# Altium PCB PCB1.PcbDoc
Units mm, origin at the board's own origin, x right, y up, seen from the top; angles counter-clockwise.
Board outline 90.04 x 75.06 mm, 2 copper layers (Top Layer, Bottom Layer); 75 components, 54 nets, 231 pads, 8 vias.
Unrouted connection lines stored in the file: 11.
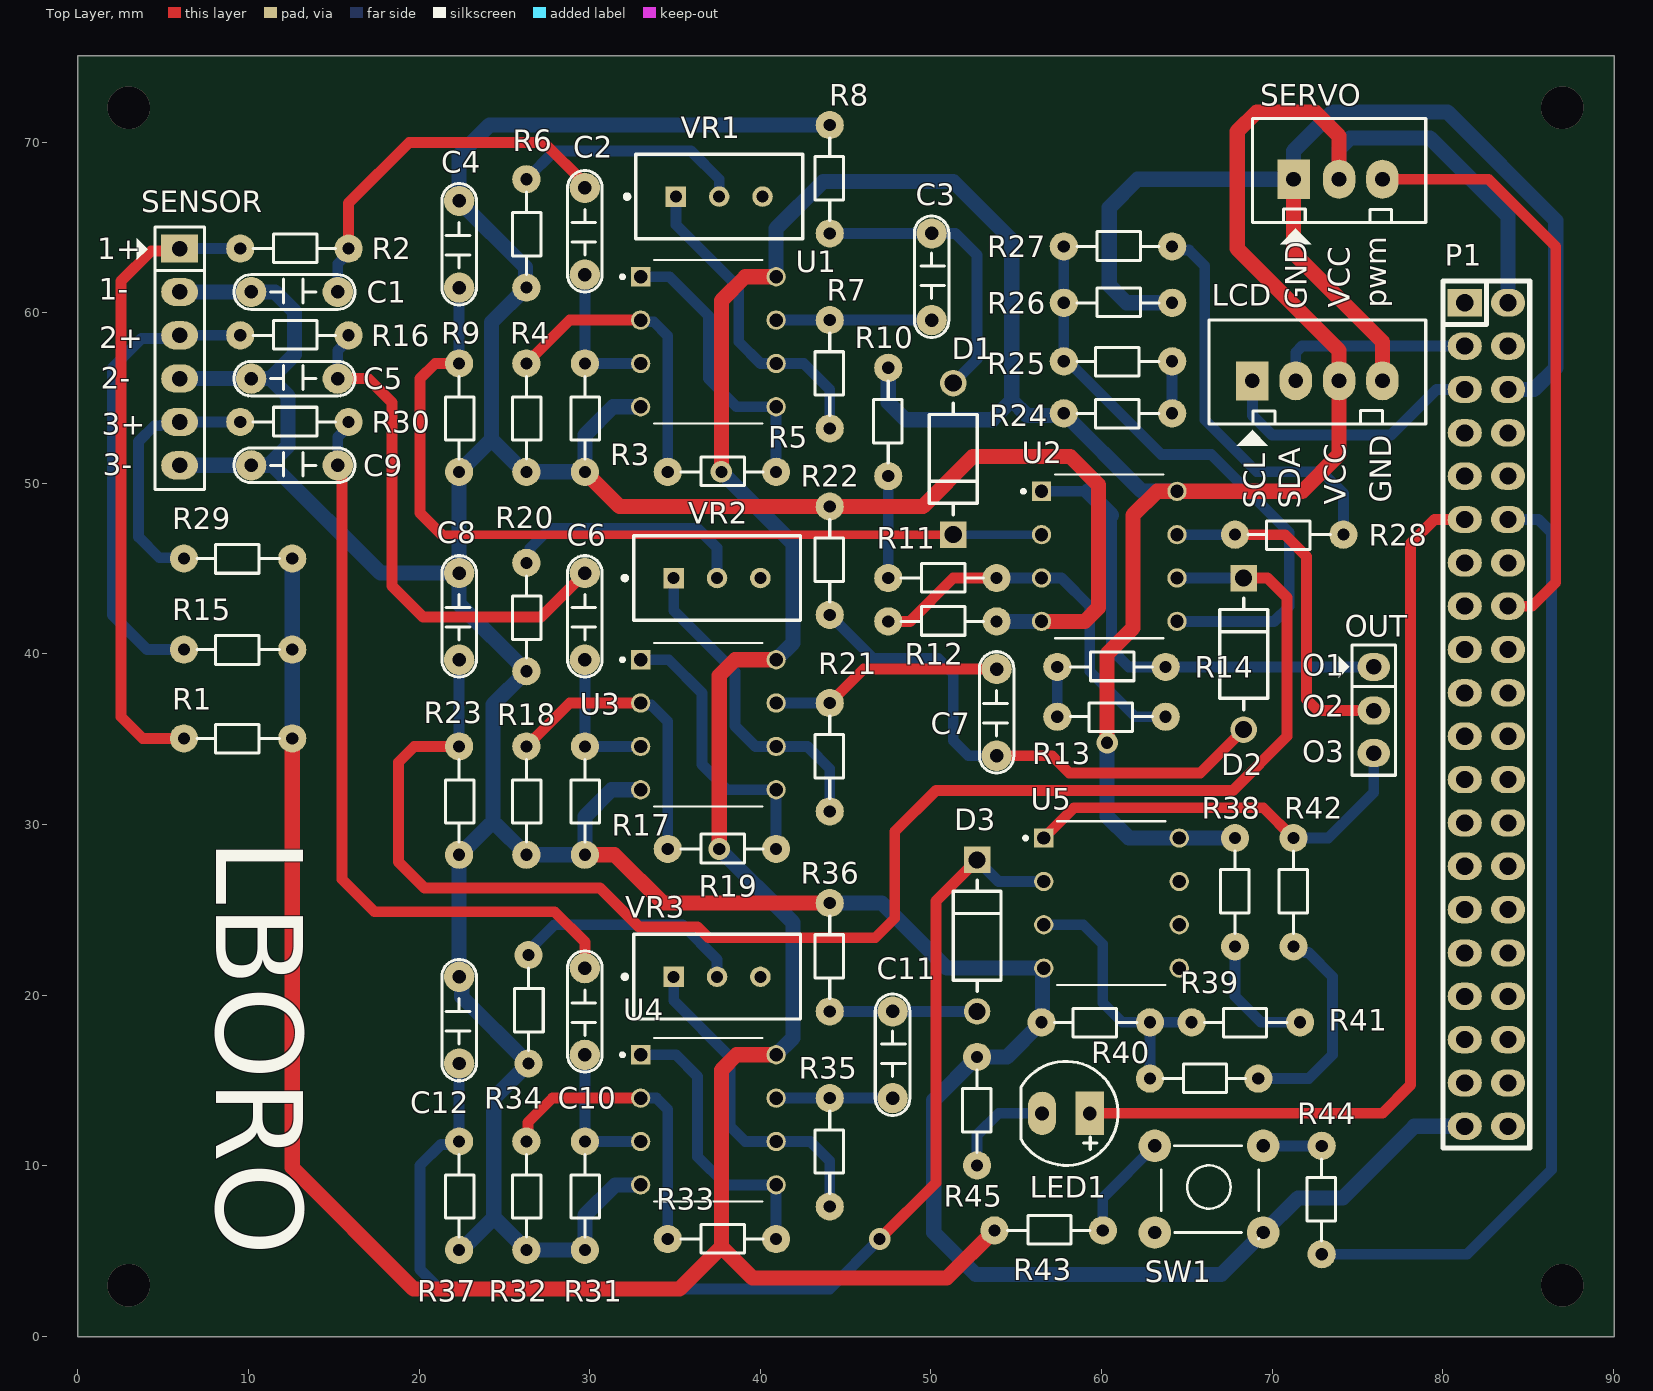
[diagram p0: Top Layer view]
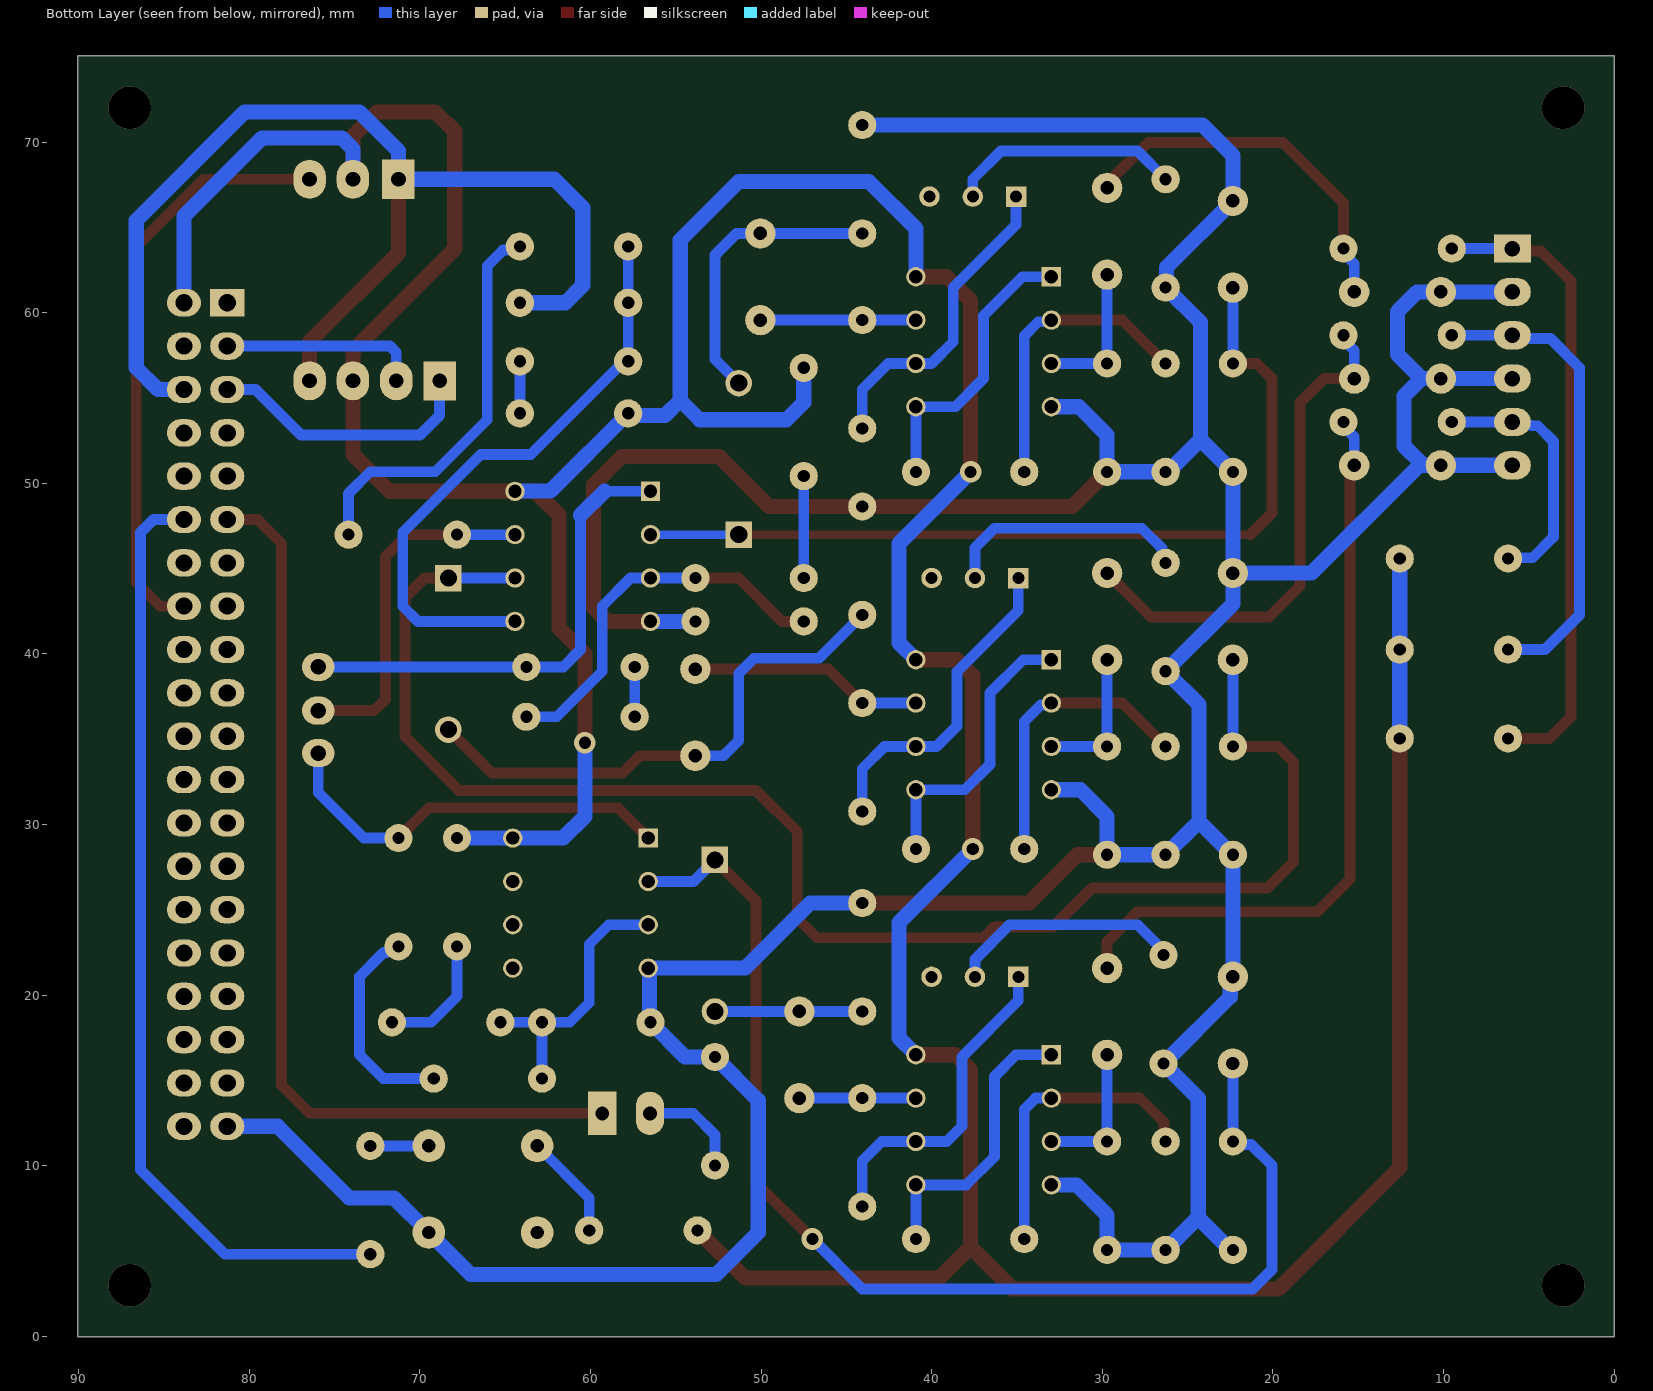
[diagram p1: Bottom Layer view, seen from below]
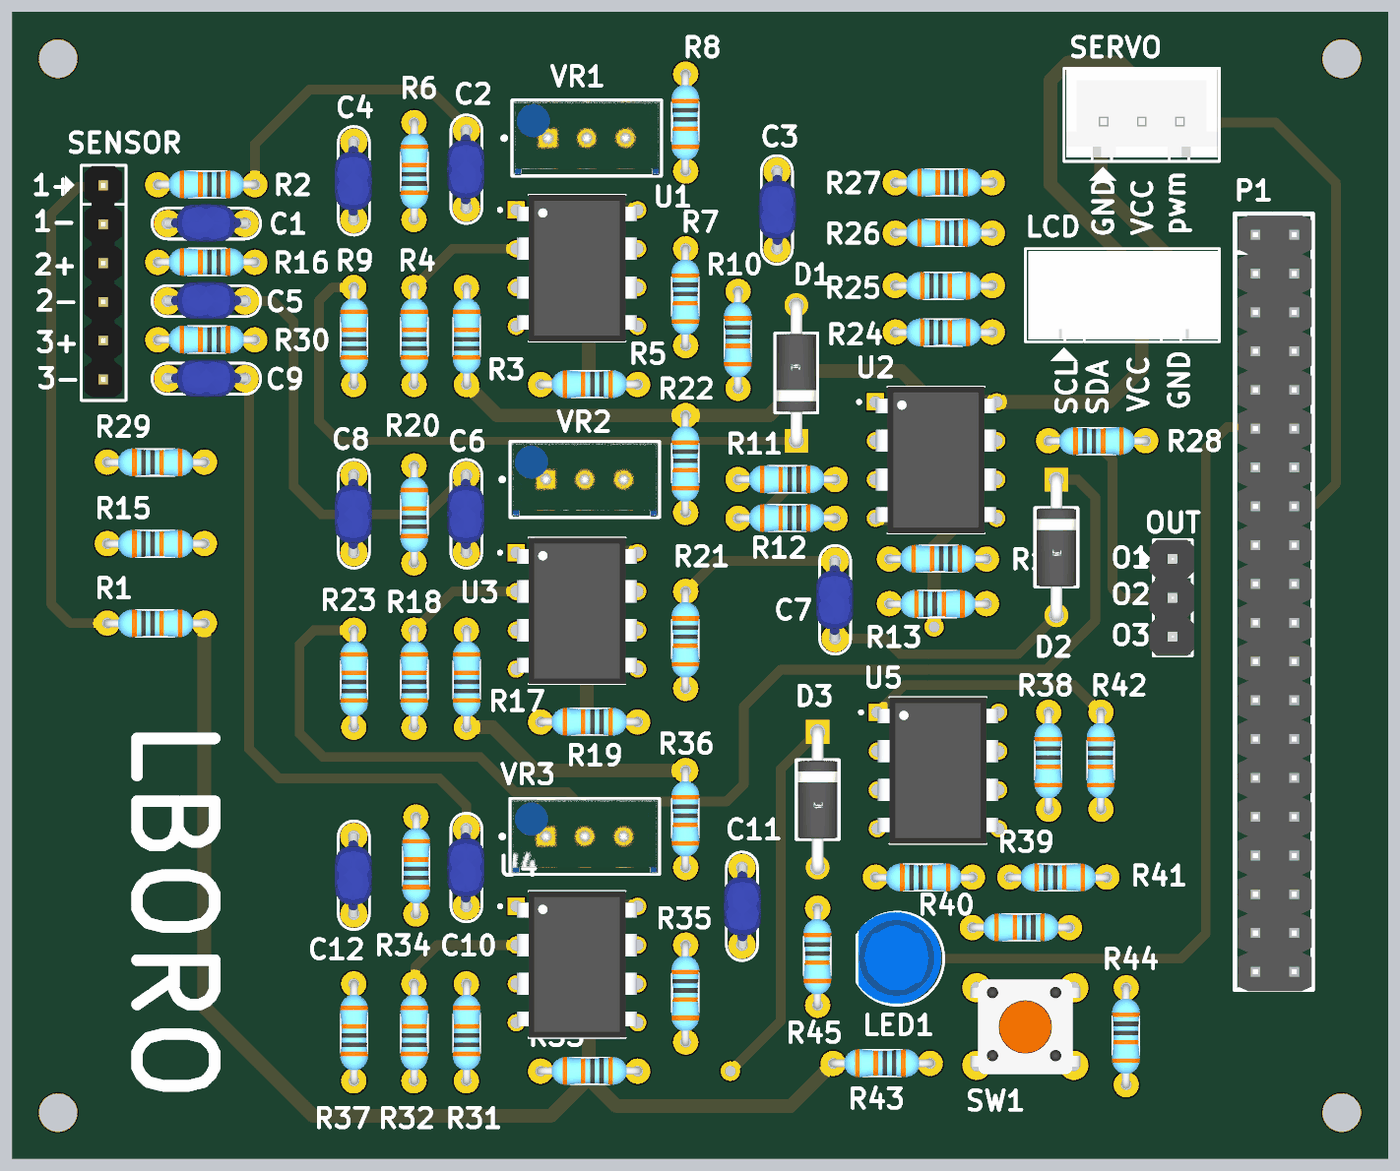
[diagram p2: 3D render of the assembled board from above, using the file's embedded part models]

## Layer stack, top to bottom
Top Solder: solder mask 0.0102, Solder Resist, Dk 3.5
Top Layer: signal copper 0.0356
Dielectric 1: dielectric 0.32, FR-4, Dk 4.8
Bottom Layer: signal copper 0.0356
Bottom Solder: solder mask 0.0102, Solder Resist, Dk 3.5

## Board outline
0,0 90.043,0 90.043,75.057 0,75.057

## Design rules (kind name [scope] priority, off if disabled: settings)
Clearance [All] p1: gap=0.254 ignorepadtopadclearanceinfootprint=FALSE except(0: Arc-Hole Track-Hole SMDPad-Hole THPad-Hole Via-Hole Fill-Hole Poly-Hole Region-Hole Text-Hole)
PolygonConnect [All] p1: connectstyle=Relief reliefconductorwidth=0.254 reliefentries=4 polygonreliefangle="90 Angle" airgapwidth=0.254
RoutingVias [All] p1: holewidth=0.711 width=1.27 viastyle="Through Hole" minholewidth=0.711 minwidth=1.27 maxholewidth=0.711 maxwidth=1.27
SolderMaskExpansion [All] p1: expansion=0.102 istentingtop=FALSE
Width [All] p1: maxlimit=1.016 minlimit=0.508 preferedwidth=0.762 minimp=50.000000 maximp=50.000000 favimp=50.000000
30 further rules are at their usual default settings.

## Components (designator, comment, footprint, x,y, rotation, side; value= is the part's Value field where it differs from the comment)
C1 "104" CAP_CERAMIC_MULTI 12.7,61.214 r0 top value=100nF
C2 "104" CAP_CERAMIC_MULTI 29.718,64.77 r90 top value=100nF
C3 "104" CAP_CERAMIC_MULTI 50.038,62.103 r270 top value=100nF
C4 "0.05uF" CAP_CERAMIC_MULTI 22.352,64.008 r90 top value=100nF
C5 "104" CAP_CERAMIC_MULTI 12.7,56.134 r0 top value=100nF
C6 "104" CAP_CERAMIC_MULTI 29.718,42.202 r90 top value=100nF
C7 "104" CAP_CERAMIC_MULTI 53.848,36.576 r90 top value=100nF
C8 "0.05uF" CAP_CERAMIC_MULTI 22.352,42.202 r90 top value=100nF
C9 "104" CAP_CERAMIC_MULTI 12.7,51.054 r0 top value=100nF
C10 "104" CAP_CERAMIC_MULTI 29.718,19.05 r90 top value=100nF
C11 "104" CAP_CERAMIC_MULTI 47.752,16.51 r270 top value=100nF
C12 "0.05uF" CAP_CERAMIC_MULTI 22.352,18.542 r90 top value=100nF
D1 "1N4004" DO-41 51.308,51.43 r90 top
D2 "1N4004" DO-41 68.326,40.005 r270 top
D3 "1N4004" DO-41 52.705,23.49 r270 top
LCD "LCD" CON4 68.834,56.007 r0 top value="Connector 3" (schematic designator P5)
LED1 "LED" LED-5-BLUE 57.912,13.081 r180 top value="LED 3 ly Single Colour"
OUT "OUTPUT" JP3 75.946,36.703 r270 top (schematic designator P3)
P1 "RASP" HED20X2 81.28,60.579 r270 top
R1 "RES-1/8W" RES-1/8W-SMALL 9.398,35.052 r180 top value=2K
R2 "RES-1/8W" RES-1/8W-SMALL 12.7,63.754 r0 top value=30K
R3 "RES-1/8W" RES-1/8W-SMALL 29.718,53.848 r270 top value=150K
R4 "RES-1/8W" RES-1/8W-SMALL 26.289,53.848 r270 top value=1K
R5 "RES-1/8W" RES-1/8W-SMALL 37.752,50.673 r0 top value=100K
R6 "RES-1/8W" RES-1/8W-SMALL 26.289,64.643 r270 top value=1K
R7 "RES-1/8W" RES-1/8W-SMALL 44.069,56.388 r90 top value=5K
R8 "RES-1/8W" RES-1/8W-SMALL 44.069,67.818 r90 top value=150K
R9 "RES-1/8W" RES-1/8W-SMALL 22.352,53.848 r270 top value=300K
R10 "RES-1/8W" RES-1/8W-SMALL 47.498,53.594 r90 top value=1M
R11 "RES-1/8W" RES-1/8W-SMALL 50.673,44.45 r0 top value=2M2
R12 "RES-1/8W" RES-1/8W-SMALL 50.673,41.91 r0 top value=10K
R13 "RES-1/8W" RES-1/8W-SMALL 60.579,36.322 r180 top value=100K
R14 "RES-1/8W" RES-1/8W-SMALL 60.579,39.243 r0 top value=470K
R15 "RES-1/8W" RES-1/8W-SMALL 9.398,40.259 r180 top value=2K
R16 "RES-1/8W" RES-1/8W-SMALL 12.7,58.674 r0 top value=30K
R17 "RES-1/8W" RES-1/8W-SMALL 29.718,31.407 r270 top value=150K
R18 "RES-1/8W" RES-1/8W-SMALL 26.289,31.407 r270 top value=1K
R19 "RES-1/8W" RES-1/8W-SMALL 37.752,28.575 r0 top value=100K
R20 "RES-1/8W" RES-1/8W-SMALL 26.289,42.164 r270 top value=1K
R21 "RES-1/8W" RES-1/8W-SMALL 44.069,33.947 r90 top value=5K
R22 "RES-1/8W" RES-1/8W-SMALL 44.069,45.466 r90 top value=150K
R23 "RES-1/8W" RES-1/8W-SMALL 22.352,31.407 r270 top value=300K
R24 "RES-1/8W" RES-1/8W-SMALL 60.96,54.102 r180 top value=1M
R25 "RES-1/8W" RES-1/8W-SMALL 60.96,57.15 r180 top value=2M2
R26 "RES-1/8W" RES-1/8W-SMALL 60.96,60.579 r0 top value=10K
R27 "RES-1/8W" RES-1/8W-SMALL 60.96,63.881 r0 top value=100K
R28 "RES-1/8W" RES-1/8W-SMALL 70.993,46.99 r180 top value=470K
R29 "RES-1/8W" RES-1/8W-SMALL 9.398,45.593 r180 top value=2K
R30 "RES-1/8W" RES-1/8W-SMALL 12.7,53.594 r0 top value=30K
R31 "RES-1/8W" RES-1/8W-SMALL 29.718,8.255 r270 top value=150K
R32 "RES-1/8W" RES-1/8W-SMALL 26.289,8.255 r270 top value=1K
R33 "RES-1/8W" RES-1/8W-SMALL 37.752,5.715 r0 top value=100K
R34 "RES-1/8W" RES-1/8W-SMALL 26.416,19.177 r270 top value=1K
R35 "RES-1/8W" RES-1/8W-SMALL 44.069,10.795 r90 top value=5K
R36 "RES-1/8W" RES-1/8W-SMALL 44.069,22.225 r90 top value=150K
R37 "RES-1/8W" RES-1/8W-SMALL 22.352,8.255 r270 top value=300K
R38 "RES-1/8W" RES-1/8W-SMALL 67.818,26.035 r90 top value=1M
R39 "RES-1/8W" RES-1/8W-SMALL 68.453,18.415 r180 top value=2M2
R40 "RES-1/8W" RES-1/8W-SMALL 59.657,18.415 r180 top value=10K
R41 "RES-1/8W" RES-1/8W-SMALL 66.007,15.113 r0 top value=100K
R42 "RES-1/8W" RES-1/8W-SMALL 71.247,26.035 r90 top value=470K
R43 "RES-1/8W" RES-1/8W-SMALL 56.896,6.223 r0 top value=10K
R44 "RES-1/8W" RES-1/8W-SMALL 72.898,8.001 r90 top value=10K
R45 "RES-1/8W" RES-1/8W-SMALL 52.705,13.208 r90 top value=220
SENSOR "INPUT" JP6 5.969,63.754 r270 top (schematic designator P2)
SERVO "Servo" CON3 71.374,67.818 r0 top value="Connector 3" (schematic designator P4)
SW1 "SW" SW4 66.294,8.636 r0 top value="Button chip 4 pin"
U1 "LM358N" PDIP-8 36.957,58.293 r0 top
U2 "LM358N" PDIP-8 60.452,45.72 r0 top
U3 "LM358N" PDIP-8 36.957,35.852 r0 top
U4 "LM358N" PDIP-8 36.957,12.7 r0 top
U5 "LM358N" PDIP-8 60.579,25.4 r0 top
VR1 "3296W-1-103LF" FP-3296W-MFG 37.592,66.807 r270 top value=1K
VR2 "3296W-1-103LF" FP-3296W-MFG 37.465,44.455 r270 top value=1K
VR3 "3296W-1-103LF" FP-3296W-MFG 37.465,21.087 r270 top value=1K

## Footprints (in the part's own frame and the unit in brackets; to place one, negate y for a bottom-side part, rotate by r counter-clockwise, add the part's x,y. Pads: shape width x height; smd on the part's side, far side on the other; paste and mask are expansions set on the pad)
CAP_CERAMIC_MULTI [mil]
  round 70 hole 31: 1(-100,0) 2(100,0)
  silkscreen extent -140,-40 140,40, body extent -111,-47 111,50, height 207
CON3 [mil] "CON 3"
  rect 75x90 hole 34: 1(-5,0)
  oval 75x90 hole 34: 2(100,0) 3(200,0)
  silkscreen extent -100,-150 300,140, body extent -95,-90 295,136, height 276
CON4 [mil] "CON4"
  rect 75x90 hole 34: 1(0,0)
  oval 75x90 hole 34: 2(100,0) 3(200,0) 4(300,0)
  silkscreen extent -100,-150 400,140, body extent -92,-94 400,134, height 276
DO-41 [mm]
  rect 1.55x1.55 hole 1 paste-1000 mask+0: 1(-4.44,0)
  round 1.55 hole 1 paste-1000 mask+0: 2(4.44,0)
  silkscreen extent -3.26,-1.4 3.27,1.4, body extent -5.31,-1.5 5.32,1.5, height 0.25
FP-3296W-MFG [mm]
  rect 1.2x1.2 hole 0.7 paste-1000 mask+0: 1(0.005,-2.54)
  round 1.2 hole 0.7 paste-1000 mask+0: 2(0.005,0) 3(0.005,2.54)
  silkscreen extent -2.48,-5.52 2.48,4.89, body extent -2.58,-4.99 2.58,4.99, height 0.25
HED20X2 [mm]
  rect 1.6x2 hole 1: 1(0,0)
  oval 1.6x2 hole 1: 2(0,2.54) 3(2.54,0) 4(2.54,2.54) 5(5.08,0) 6(5.08,2.54) 7(7.62,0) 8(7.62,2.54) 9(10.16,0) 10(10.16,2.54) 11(12.7,0) 12(12.7,2.54) 13(15.24,0) 14(15.24,2.54) 15(17.78,0) 16(17.78,2.54) 17(20.32,0) 18(20.32,2.54) 19(22.86,0) 20(22.86,2.54) 21(25.4,0) 22(25.4,2.54) 23(27.94,0) 24(27.94,2.54) 25(30.48,0) 26(30.48,2.54) 27(33.02,0) 28(33.02,2.54) 29(35.56,0) 30(35.56,2.54) 31(38.1,0) 32(38.1,2.54) 33(40.64,0) 34(40.64,2.54) 35(43.18,0) 36(43.18,2.54) 37(45.72,0) 38(45.72,2.54) 39(48.26,0) 40(48.26,2.54)
  silkscreen extent -1.27,-1.27 49.53,3.81, body extent -1.17,-1.06 49.63,3.76, height 8.11
JP3 [mil] "Jumper 3"
  oval 65x75 hole 36: 1(-100,0) 2(1,0) 3(99,0)
  silkscreen extent -150,-81 150,50, body extent -150,-60 150,55, height 355
JP6 [mil] "JP6"
  rect 65x85 hole 36: 1(0,0)
  oval 65x85 hole 36: 2(100,0) 3(200,0) 4(300,0) 5(400,0) 6(500,0)
  silkscreen extent -50,-99 556,58, body extent -48,-50 548,48, height 323
LED-5-BLUE [mil] "LED 2 PIN, 5 ly , Only colour, pin to pin 110mil"
  rect 65x100 hole 32: 1(-55,0)
  oval 65x100 hole 32: 2(55,0)
  silkscreen extent -120,-120 104,120, body extent -113,-120 100,117, height 339
PDIP-8 [mm]
  rect 1.13x1.13 hole 0.78: 1(-3.97,3.81)
  round 1.13 hole 0.78: 2(-3.97,1.27) 3(-3.97,-1.27) 4(-3.97,-3.81) 5(3.97,-3.81) 6(3.97,-1.27) 7(3.97,1.27) 8(3.97,3.81)
  silkscreen extent -5.13,-4.79 3.17,4.79, body extent -3.94,-4.79 3.94,4.79, height 5.08
RES-1/8W-SMALL [mil] "R 1/8W, 2 pin, 200mil"
  round 65 hole 28: 1(-125,0) 2(125,0)
  silkscreen extent -95,-32 95,34, body extent -135,-35 135,37, height 76
SW4 [mil] "SW button 4pin, 250 x250 mil"
  round 75 hole 31: 1(-125,100) 2(125,-100) 3(125,100) 4(-125,-100)
  silkscreen extent -110,-115 115,100, body extent -156,-123 156,121, height 276

## Part data
C1 C2 C3 C4 C5 C6 C7 C8 C9 C10 C11 C12: library part "CAP RADIAL", "Radial Multilayer Ceramic Capacitor", Case Code (Imperial)=0805, Case Code (Metric)=2012, Dielectric=X7R, Dielectric Material=Ceramic, Manufacturer="Kyocera AVX", Manufacturer Part Number=LD051C104KAB2A, Max Operating Temperature=125°C, Min Operating Temperature=-55°C, Package Quantity=1, Tolerance=10%, Voltage Rating=100V, Case/Package=0805, Category="Ceramic Capacitors", ComponentLink1Description=https://datasheet.ciiva.com/16443/tinterm-16443613.pdf?src-supplier=Future+Electronics, ComponentLink1URL=https://datasheet.ciiva.com/16443/tinterm-16443613.pdf?src-supplier=Future+Electronics, ComponentLink2Description=https://datasheet.ciiva.com/6256/tinterm-6256703.pdf?src-supplier=Digi-Key, ComponentLink2URL=https://datasheet.ciiva.com/6256/tinterm-6256703.pdf?src-supplier=Digi-Key, Depth=1.25mm, Height=1.4mm, Lead Free="Contains Lead", Length=0.079inch, Mounting Technology="Surface Mount", Packaging="Tape and Reel", Pins=2, Pricing="2000=0,35070 (USD)", RoHS=No, RoHS Compliant=No, Series=LD, Stock=6000, Supplier="Arrow Electronics", Supplier Part Number=LD051C104KAB2A, Termination=SMD/SMT, Thickness=0.037inch, Voltage Rating (DC)=100V, Weight=0.000194oz, Width=0.049inch
D1 D2 D3: "Diode 1N4004 DO-41, 400V, 1.00A", Forward Voltage=1V, Manufacturer=Diotec, Manufacturer Part Number=1N4007, Max Operating Temperature=175°C, Max Surge Current=27A, Min Operating Temperature=-50°C, Peak Non-Repetitive Surge Current=30A, Supplier Part Number=637-1N4007, Category="Rectifier Diodes", ComponentLink1Description=https://datasheet.ciiva.com/26325/162272-da-01-ml-1n4007-silizium-diode-de-en-26325271.pdf?src-supplier=Conrad, ComponentLink1URL=https://datasheet.ciiva.com/26325/162272-da-01-ml-1n4007-silizium-diode-de-en-26325271.pdf?src-supplier=Conrad, ComponentLink2Description=https://datasheet.ciiva.com/48433/1n400x-eng-tds-48433165.pdf?src-supplier=Distrelec, ComponentLink2URL=https://datasheet.ciiva.com/48433/1n400x-eng-tds-48433165.pdf?src-supplier=Distrelec, Element Configuration=Single, Mounting Technology="Through Hole", Packaging="Ammo Pack", Pins=2, Polarity=Standard, Pricing="1=0,40000, 10=0,13200, 50=0,13200, 100=0,09500, 500=0,06900, 1000=0,06600, 2500=0,06100, 5000=0,05200, 10000=0,04700 (USD)", RoHS=Yes, RoHS Compliant=Yes, Stock=171929, Supplier=Mouser
LCD: library part "CON 4", "Connector 4"
LED1: "LED Single colour Green and Red"
OUT: library part JP3, "HEADER 3P", Case/Package=SIL, Color=Black, Contact Resistance=30mR, Current Rating=3A, Insulation Resistance=10GR, Manufacturer=Harwin, Manufacturer Part Number=M20-9990246, Max Operating Temperature=105°C, Min Operating Temperature=-40°C, Package Quantity=1000, Supplier Part Number=7457065, Voltage Rating (AC)=750V, Category="Headers and Wire Housings", ComponentLink1Description=https://datasheet.ciiva.com/8046/315376-8046930.pdf?src-supplier=Element14, ComponentLink1URL=https://datasheet.ciiva.com/8046/315376-8046930.pdf?src-supplier=Element14, ComponentLink2Description=https://datasheet.ciiva.com/22660/1830818-22660571.pdf?src-supplier=Element14, ComponentLink2URL=https://datasheet.ciiva.com/22660/1830818-22660571.pdf?src-supplier=Element14, ComponentLink3Description=https://datasheet.ciiva.com/11745/0900766b81034e61-11745755.pdf?src-supplier=Rs, ComponentLink3URL=https://datasheet.ciiva.com/11745/0900766b81034e61-11745755.pdf?src-supplier=Rs, ComponentLink4Description=https://datasheet.ciiva.com/6833/m20-999-6833368.pdf?src-supplier=Digi-Key, ComponentLink4URL=https://datasheet.ciiva.com/6833/m20-999-6833368.pdf?src-supplier=Digi-Key, ComponentLink5Description=https://datasheet.ciiva.com/26852/getdatasheetpartid-384170-26852203.pdf?src-supplier=Verical, ComponentLink5URL=https://datasheet.ciiva.com/26852/getdatasheetpartid-384170-26852203.pdf?src-supplier=Verical, Connector Type="Male Pin", Contact Material=Bronze,Brass, Contact Mating Length=0.24inch, Contact Plating=Tin, Contact Type="Male Pin", Depth=2.54mm, Gender=Male, Housing Color=Black, Housing Material=Nylon, Length=5.08mm, Max Current Rating=3A, Mounting Technology="Through Hole", Number of Contacts=2, Number of Positions=2, Number of Rows=1, Orientation=Straight, Packaging=Bulk, Pitch=2.54mm, Pricing="10=0,07900, 100=0,07400 (GBP)", Radiation Hardening=No, Reach SVHC Compliant=Yes, RoHS=Yes, RoHS Compliant=Yes, Series=M20, Stock=4090, Supplier=Rs, Termination=Solder
P1: library part "HEADER 2X20P", "HEADER 2X20P", Case/Package=SIL, Color=Black, Contact Resistance=30mR, Current Rating=3A, Insulation Resistance=10GR, Manufacturer=Harwin, Manufacturer Part Number=M20-9990246, Max Operating Temperature=105°C, Min Operating Temperature=-40°C, Package Quantity=1000, Supplier Part Number=7457065, Voltage Rating (AC)=750V, Category="Headers and Wire Housings", ComponentLink1Description=https://datasheet.ciiva.com/8046/315376-8046930.pdf?src-supplier=Element14, ComponentLink1URL=https://datasheet.ciiva.com/8046/315376-8046930.pdf?src-supplier=Element14, ComponentLink2Description=https://datasheet.ciiva.com/22660/1830818-22660571.pdf?src-supplier=Element14, ComponentLink2URL=https://datasheet.ciiva.com/22660/1830818-22660571.pdf?src-supplier=Element14, ComponentLink3Description=https://datasheet.ciiva.com/11745/0900766b81034e61-11745755.pdf?src-supplier=Rs, ComponentLink3URL=https://datasheet.ciiva.com/11745/0900766b81034e61-11745755.pdf?src-supplier=Rs, ComponentLink4Description=https://datasheet.ciiva.com/6833/m20-999-6833368.pdf?src-supplier=Digi-Key, ComponentLink4URL=https://datasheet.ciiva.com/6833/m20-999-6833368.pdf?src-supplier=Digi-Key, ComponentLink5Description=https://datasheet.ciiva.com/26852/getdatasheetpartid-384170-26852203.pdf?src-supplier=Verical, ComponentLink5URL=https://datasheet.ciiva.com/26852/getdatasheetpartid-384170-26852203.pdf?src-supplier=Verical, Connector Type="Male Pin", Contact Material=Bronze,Brass, Contact Mating Length=0.24inch, Contact Plating=Tin, Contact Type="Male Pin", Depth=2.54mm, Gender=Male, Housing Color=Black, Housing Material=Nylon, Length=5.08mm, Max Current Rating=3A, Mounting Technology="Through Hole", Number of Contacts=2, Number of Positions=2, Number of Rows=1, Orientation=Straight, Packaging=Bulk, Pitch=2.54mm, Pricing="10=0,07900, 100=0,07400 (GBP)", Radiation Hardening=No, Reach SVHC Compliant=Yes, RoHS=Yes, RoHS Compliant=Yes, Series=M20, Stock=4090, Supplier=Rs, Termination=Solder
R1 R2 R3 R4 R5 R6 R7 R8 R9 R10 R11 R12 R13 R14 R15 R16 R17 R18 R19 R20 R21 R22 R23 R24 R25 R26 R27 R28 R29 R30 R31 R32 R33 R34 R35 R36 R37 R38 R39 R40 R41 R42 R43 R44 R45: "RES 1/8W", Case Code (Imperial)=0805, Case Code (Metric)=2012, Manufacturer=Bourns, Manufacturer Part Number=CR0805-JW-331ELF, Max Operating Temperature=155°C, Max Power Dissipation=125mW, Min Operating Temperature=-55°C, Package Quantity=1, Resistance Tolerance=5%, Resistor Type="Thick Film", Temperature Coefficient=200ppm/°C, Voltage Rating=150V, Case/Package=0805, Category="Chip SMD Resistors", ComponentLink1Description=https://datasheet.ciiva.com/22713/691949-22713270.pdf?src-supplier=Element14, ComponentLink1URL=https://datasheet.ciiva.com/22713/691949-22713270.pdf?src-supplier=Element14, ComponentLink2Description=https://datasheet.ciiva.com/9119/chpreztr-9119959.pdf?src-supplier=Avnet, ComponentLink2URL=https://datasheet.ciiva.com/9119/chpreztr-9119959.pdf?src-supplier=Avnet, ComponentLink3Description=https://datasheet.ciiva.com/46383/1791942-46383770.pdf?src-supplier=Element14, ComponentLink3URL=https://datasheet.ciiva.com/46383/1791942-46383770.pdf?src-supplier=Element14, ComponentLink4Description=https://datasheet.ciiva.com/6547/chpreztr-6547356.pdf?src-supplier=Digi-Key, ComponentLink4URL=https://datasheet.ciiva.com/6547/chpreztr-6547356.pdf?src-supplier=Digi-Key, ComponentLink5Description=https://datasheet.ciiva.com/6547/chpreztr-6547357.pdf?src-supplier=Digi-Key, ComponentLink5URL=https://datasheet.ciiva.com/6547/chpreztr-6547357.pdf?src-supplier=Digi-Key, ComponentLink6Description=https://datasheet.ciiva.com/6547/chpreztr-6547358.pdf?src-supplier=Digi-Key, ComponentLink6URL=https://datasheet.ciiva.com/6547/chpreztr-6547358.pdf?src-supplier=Digi-Key, ComponentLink7Description=https://datasheet.ciiva.com/7986/1902866-7986190.pdf?src-supplier=Element14, ComponentLink7URL=https://datasheet.ciiva.com/7986/1902866-7986190.pdf?src-supplier=Element14, Construction=Rectangular, Contact Plating=Tin, Depth=1.25mm, Features="Moisture Resistant", Height=0.024inch, Length=2mm, Military Standard=Not, Mounting Technology="Surface Mount", Number of Terminations=2, Packaging="Tape and Reel", Pins=2, Power Rating=125mW, Pricing="5000=0,00270, 10000=0,00240, 25000=0,00210, 50000=0,00210 (USD)", Radiation Hardening=No, Reach SVHC Compliant=Yes, RoHS=Yes, RoHS Compliant=Yes, Series=CR0805, Stock=10000, Supplier="Arrow Electronics", Supplier Part Number=CR0805-JW-331ELF, Termination=SMD/SMT, Thickness=508um, Tolerance=5%, Voltage Rating (DC)=150V, Width=1.25mm
SENSOR: library part JP6, "Male Header 2.54mm (0.1\") Pitch SIL Vertical PC Tail Pin Header, 6.1mm mating pin height, tin, 2 contacts", Case/Package=SIL, Color=Black, Contact Resistance=30mR, Current Rating=3A, Insulation Resistance=10GR, Manufacturer=Harwin, Manufacturer Part Number=M20-9990246, Max Operating Temperature=105°C, Min Operating Temperature=-40°C, Package Quantity=1000, Supplier Part Number=7457065, Voltage Rating (AC)=750V, Category="Headers and Wire Housings", ComponentLink1Description=https://datasheet.ciiva.com/8046/315376-8046930.pdf?src-supplier=Element14, ComponentLink1URL=https://datasheet.ciiva.com/8046/315376-8046930.pdf?src-supplier=Element14, ComponentLink2Description=https://datasheet.ciiva.com/22660/1830818-22660571.pdf?src-supplier=Element14, ComponentLink2URL=https://datasheet.ciiva.com/22660/1830818-22660571.pdf?src-supplier=Element14, ComponentLink3Description=https://datasheet.ciiva.com/11745/0900766b81034e61-11745755.pdf?src-supplier=Rs, ComponentLink3URL=https://datasheet.ciiva.com/11745/0900766b81034e61-11745755.pdf?src-supplier=Rs, ComponentLink4Description=https://datasheet.ciiva.com/6833/m20-999-6833368.pdf?src-supplier=Digi-Key, ComponentLink4URL=https://datasheet.ciiva.com/6833/m20-999-6833368.pdf?src-supplier=Digi-Key, ComponentLink5Description=https://datasheet.ciiva.com/26852/getdatasheetpartid-384170-26852203.pdf?src-supplier=Verical, ComponentLink5URL=https://datasheet.ciiva.com/26852/getdatasheetpartid-384170-26852203.pdf?src-supplier=Verical, Connector Type="Male Pin", Contact Material=Bronze,Brass, Contact Mating Length=0.24inch, Contact Plating=Tin, Contact Type="Male Pin", Depth=2.54mm, Gender=Male, Housing Color=Black, Housing Material=Nylon, Length=5.08mm, Max Current Rating=3A, Mounting Technology="Through Hole", Number of Contacts=2, Number of Positions=2, Number of Rows=1, Orientation=Straight, Packaging=Bulk, Pitch=2.54mm, Pricing="10=0,07900, 100=0,07400 (GBP)", Radiation Hardening=No, Reach SVHC Compliant=Yes, RoHS=Yes, RoHS Compliant=Yes, Series=M20, Stock=4090, Supplier=Rs, Termination=Solder
SERVO: library part Con3, "Connector 3"
SW1: library part SW4, "Switch button 4 pin"
U1 U2 U3 U4 U5: Package=None, Availability=Unavailable, MP=LM358PE3, Price=None
VR1 VR2 VR3: "Trimmer 3296W, Cermet, Res 10 Kilohms. VR103", Color=Blue, Insulation Resistance=1GR, Manufacturer=Bourns, Max Operating Temperature=125°C, Max Power Dissipation=500mW, Min Operating Temperature=-55°C, Package Quantity=50, Resistance Tolerance=10%, Resistor Type=Cermet, Supplier Part Number=5219647, Temperature Coefficient=100ppm/°C, Category="Variable Resistors and Potentiometers", ComponentLink1Description=https://datasheet.ciiva.com/11830/0900766b8069ccf4-11830871.pdf?src-supplier=Rs, ComponentLink1URL=https://datasheet.ciiva.com/11830/0900766b8069ccf4-11830871.pdf?src-supplier=Rs, ComponentLink2Description=https://datasheet.ciiva.com/19454/853572-19454866.pdf?src-supplier=Jameco, ComponentLink2URL=https://datasheet.ciiva.com/19454/853572-19454866.pdf?src-supplier=Jameco, ComponentLink3Description=https://datasheet.ciiva.com/29122/447277-da-01-en-trimmer-tht3296w-1-103lf-10k-0-5w-29122362.pdf?src-supplier=Conrad, ComponentLink3URL=https://datasheet.ciiva.com/29122/447277-da-01-en-trimmer-tht3296w-1-103lf-10k-0-5w-29122362.pdf?src-supplier=Conrad, ComponentLink4Description=https://datasheet.ciiva.com/14173/ew3296-dat-e-14173022.pdf?src-supplier=Distrelec, ComponentLink4URL=https://datasheet.ciiva.com/14173/ew3296-dat-e-14173022.pdf?src-supplier=Distrelec, ComponentLink5Description=https://datasheet.ciiva.com/3266/3296-3266187.pdf?src-supplier=Avnet, ComponentLink5URL=https://datasheet.ciiva.com/3266/3296-3266187.pdf?src-supplier=Avnet, ComponentLink6Description=https://datasheet.ciiva.com/2156/3296-2156893.pdf?src-supplier=Digi-Key, ComponentLink6URL=https://datasheet.ciiva.com/2156/3296-2156893.pdf?src-supplier=Digi-Key, ComponentLink7Description=https://datasheet.ciiva.com/30093/3296-30093899.pdf?src-supplier=Onlinecomponents.com, ComponentLink7URL=https://datasheet.ciiva.com/30093/3296-30093899.pdf?src-supplier=Onlinecomponents.com, ComponentLink8Description=https://datasheet.ciiva.com/18411/70153578-18411561.pdf?src-supplier=Allied+Electronics, ComponentLink8URL=https://datasheet.ciiva.com/18411/70153578-18411561.pdf?src-supplier=Allied+Electronics, ComponentLink9Description=https://datasheet.ciiva.com/1131/1815117-1131273.pdf?src-supplier=Element14, ComponentLink9URL=https://datasheet.ciiva.com/1131/1815117-1131273.pdf?src-supplier=Element14, Contact Plating=Tin,Matte, Depth=4.83mm, Height=11.55mm, Lead Free="Lead Free", Length=9.53mm, Manufacturer Part Number=3296W-1-103LF, Military Standard=Not, Mounting Technology="Through Hole,PCB", Number of Turns=25, Packaging=Rail/Tube, Power Rating=500mW, Pricing="1=2,69000, 25=2,53000, 50=2,29000, 100=2,13000, 250=1,91000 (GBP)", Radiation Hardening=No, Reach SVHC Compliant=Yes, RoHS=Yes, RoHS Compliant=Yes, Series=3296, Stock=3137, Supplier=Rs, Taper=Linear, Technology=CERMET, Termination=Pin, Tolerance=10%, Weight=0.03oz, Width=9.53mm

## Via types
v1: diameter 2.5, hole 2.5, Top Layer to Bottom Layer, 4 vias
v2: diameter 1.27, hole 0.711, Top Layer to Bottom Layer, 4 vias

## Nets (pads, with @x,y where several pads share a name; then routed paths per layer and width w, separated by ;. In a path a pad name is that pad's centre, name@x,y a point inside that pad or via, vN(x,y) a via of type N, cw(c..) or ccw(c..) an arc to the next point about the centre after c; other vN are vias at no path point)
3V3: P1.1 P1.17
BT: P1.12 R44.1 | length 56
  Top Layer w0.635: R44.1 R44.1@73.117,5.045
  Bottom Layer w0.635: R44.1 81.407,4.826 86.36,9.779 86.36,47.117 85.598,47.879 P1.12
GND: C1.1 C4.2 C5.1 C8.2 C9.1 C12.2 LCD.4 P1.6 P1.9 P1.14 P1.20 P1.25 P1.30 P1.34 P1.39 R3.2 R4.2 R6.2 R8.2 R9.2 R12.2 R17.2 R18.2 R20.2 R22.2 R23.2 R26.2 R31.2 R32.2 R34.2 R36.2 R37.2 R40.2 R45.2 SENSOR.2 SENSOR.4 SENSOR.6 SERVO.1 SW1.2 U1.4 U2.4 U3.4 U4.4 U5.4 | length 372.7
  Top Layer w0.889: R17.2 31.458,28.232 34.29,25.4 R36.2 ; R3.2 31.75,48.641 R22.2 49.53,48.641 52.451,51.562 58.166,51.562 59.817,49.911 59.817,42.712 59.015,41.91 U2.4 ; SERVO.1 71.247,63.5 76.454,58.293 LCD.4
  Bottom Layer w0.635: R37.2 R37.2@22.479,5.08 ; C12.2 C12.2@22.503,20.931 ; 24.168,30.01 24.331,30.01 24.511,30.01 ; R4.2@26.162,50.673 R4.2 ; R6.2@26.238,61.519 R6.2 ; R40.2 R40.2@56.546,18.479 ; U5.4@56.546,21.526 U5.4
  Bottom Layer w0.889: SENSOR.6 C9.1 11.43,51.054 17.742,44.742 C8.2 ; SENSOR.4 C5.1 11.292,56.134 ; SENSOR.2 C1.1 11.557,61.214 12.7,60.071 12.7,57.542 11.292,56.134 ; 11.327,51.205 12.319,52.197 12.319,55.107 11.292,56.134 ; C12.2 R23.2@22.352,28.194 ; R9.2 C8.2 ; R23.2@22.371,28.213 24.168,30.01 ; R9.2@22.395,50.716 24.257,52.578 ; R37.2@22.479,5.08 24.384,6.985 ; C12.2@22.503,20.931 22.503,19.915 R34.2 24.384,13.97 24.384,6.985 ; 24.331,30.01 24.331,37.031 R20.2 22.352,42.926 C8.2 ; 24.511,30.01 R18.2 R17.2 29.718,30.48 31.28,32.042 U3.4 ; R4.2@26.162,50.673 24.257,52.578 ; R6.2@26.238,61.519 26.238,62.662 C4.2 22.352,69.215 24.13,70.993 R8.2 ; R4.2 R3.2 29.718,52.832 31.369,54.483 U1.4 ; R6.2 24.257,59.436 24.257,52.578 ; U4.4 31.496,8.89 29.718,7.112 R31.2 R32.2 24.384,6.985 ; R36.2 47.117,25.4 50.927,21.59 U5.4 ; R12.2 U2.4 ; R40.2 54.45,16.383 R45.2 50.165,13.843 50.165,6.096 52.622,3.639 67.012,3.639 SW1.2 71.501,8.128 74.132,8.128 78.323,12.319 P1.39 ; R40.2@56.546,18.479 U5.4@56.546,21.526 ; R26.2 61.468,60.579 60.452,61.595 60.452,66.167 62.103,67.818 SERVO.1 71.247,69.469 73.533,71.755 80.264,71.755 86.614,65.405 86.614,56.769 85.344,55.499 P1.6
inA1+: C2.1 R3.1 U1.3 | length 8.5
  Bottom Layer w0.635: C2.1 R3.1 U1.3
inA1-: R4.1 R5.1 U1.2 | length 17.8
  Top Layer w0.635: R4.1@26.352,56.959 R4.1 28.829,59.563 U1.2
  Bottom Layer w0.635: U1.2 33.083,59.467 33.751,59.467 34.577,58.641 R5.1
inA2+: C6.1 R17.1 U3.3 | length 8.3
  Bottom Layer w0.635: C6.1 R17.1 U3.3
inA2-: R18.1 R19.1 U3.2 | length 17.3
  Top Layer w0.635: R18.1 28.829,37.122 U3.2
  Bottom Layer w0.635: U3.2 33.106,37.003 33.609,37.003 34.577,36.035 R19.1
inA3+: C10.1 R31.1 U4.3 | length 8.3
  Bottom Layer w0.635: C10.1 R31.1 U4.3
inA3-: R32.1 R33.1 U4.2 | length 17.8
  Top Layer w0.635: R32.1 26.396,11.537 26.396,12.553 27.813,13.97 U4.2
  Bottom Layer w0.635: U4.2 33.909,13.97 34.577,13.302 R33.1
inB1+: R5.2 U1.1 U1.5 | length 17.1
  Bottom Layer w0.635: U1.1 34.671,62.103 36.957,59.817 36.957,56.134 38.608,54.483 U1.5 R5.2
inB1-: R7.1 U1.6 VR1.1 | length 18.8
  Bottom Layer w0.635: VR1.1 35.052,65.151 38.735,61.468 38.735,58.293 40.005,57.023 U1.6 42.545,57.023 44.069,55.499 R7.1
inB2+: R19.2 U3.1 U3.5 | length 17
  Bottom Layer w0.635: U3.1 34.633,39.662 36.576,37.719 36.576,33.528 38.062,32.042 U3.5 R19.2
inB2-: R21.1 U3.6 VR2.1 | length 19.3
  Bottom Layer w0.635: VR2.1 34.925,42.545 38.516,38.954 38.516,35.779 39.713,34.582 U3.6 42.761,34.582 44.069,33.274 R21.1
inB3+: R33.2 U4.1 U4.5 | length 17
  Bottom Layer w0.635: U4.1 35.052,16.51 36.322,15.24 36.322,10.541 37.973,8.89 U4.5 R33.2
inB3-: R35.1 U4.6 VR3.1 | length 19.5
  Bottom Layer w0.635: VR3.1 34.925,19.685 38.227,16.383 38.227,12.319 39.116,11.43 U4.6 42.926,11.43 44.069,10.287 R35.1
inC1+: R11.2 R12.1 R13.1 U2.3 | length 22.9
  Top Layer w0.635: R12.1 48.768,41.91 51.308,44.45 R11.2
  Bottom Layer w0.635: R11.2 U2.3 57.658,44.45 59.309,42.799 59.309,38.989 61.976,36.322 R13.1
inC1-: C4.1 D1.1 R9.1 U2.2 | length 51.9
  Top Layer w0.508: 21.326,47 21.336,46.99 D1.1
  Top Layer w0.635: 21.326,47 20.066,48.26 20.066,56.134 20.955,57.023 R9.1
  Bottom Layer w0.508: D1.1 U2.2
  Bottom Layer w0.635: R9.1 C4.1 ; D1.1 D1.1@51.318,46.98
inC2+: R25.2 R26.1 R27.1 U2.5 | length 35.4
  Bottom Layer w0.635: R27.1 R26.1 R25.2 58.039,57.15 63.5,51.689 66.421,51.689 70.993,47.117 70.993,42.799 70.104,41.91 U2.5
inC2-: C8.1 D2.1 R23.1 U2.6 | length 91.7
  Top Layer w0.635: R23.1 19.723,34.582 18.796,33.655 18.796,27.813 20.32,26.289 30.607,26.289 32.893,24.003 36.322,24.003 36.957,23.368 46.736,23.368 47.879,24.511 47.879,29.591 50.292,32.004 67.691,32.004 70.866,35.179 70.866,43.307 69.728,44.445 D2.1
  Bottom Layer w0.635: R23.1@22.352,34.544 R23.1 C8.1 ; U2.6 68.321,44.45 D2.1
inC3+: R39.2 R40.1 R41.1 U5.3 | length 16.6
  Bottom Layer w0.635: U5.3 58.928,24.13 60.071,22.987 60.071,19.558 61.214,18.415 R40.1@62.738,18.415 ; R41.1 R40.1 R39.2 R39.2@65.059,18.634
inC3-: C12.1 D3.1 R37.1 U5.2 | length 71.1
  Top Layer w0.635: v2(46.99,5.715) 50.292,9.017 50.292,25.517 D3.1
  Bottom Layer w0.635: C12.1 R37.1 22.182,11.26 21.293,11.26 20.066,10.033 20.066,3.937 21.209,2.794 44.069,2.794 v2(46.99,5.715) ; D3.1 53.965,26.67 U5.2
LED: LED1.1 P1.11 | length 55.4
  Top Layer w0.635: LED1.1@59.276,12.319 59.276,12.509 59.848,13.081 76.454,13.081 78.105,14.732 78.105,46.482 79.502,47.879 P1.11
NetC1_2: C1.2 C2.2 R2.2 | length 22
  Top Layer w0.635: R2.2 15.875,66.421 19.431,69.977 27.305,69.977 29.718,67.564 C2.2
  Bottom Layer w0.635: C1.2 15.24,62.865 15.875,63.5 R2.2
NetC3_1: C3.1 D1.2 R8.1 | length 17.2
  Bottom Layer w0.635: R8.1 C3.1 51.435,64.643 52.705,63.373 52.705,57.267 D1.2
NetC5_2: C5.2 C6.2 R16.2 | length 30.4
  Top Layer w0.635: C5.2 17.018,56.134 18.415,54.737 18.415,43.986 20.237,42.164 27.14,42.164 C6.2
  Bottom Layer w0.635: C5.2 15.24,57.785 15.875,58.42 R16.2
NetC7_1: C7.1 D2.2 R22.1 | length 31.5
  Top Layer w0.635: C7.1 57.089,34.036 58.105,33.02 65.781,33.02 D2.2
  Bottom Layer w0.635: R22.1 46.609,39.751 50.419,39.751 51.308,38.862 51.308,34.925 52.197,34.036 C7.1
NetC9_2: C9.2 C10.2 R30.2 | length 44.4
  Top Layer w0.635: C9.2 15.483,50.811 15.483,50.132 15.494,50.121 15.494,26.797 17.399,24.892 27.94,24.892 29.718,23.114 C10.2
  Bottom Layer w0.635: C9.2 15.24,52.705 15.875,53.34 R30.2
NetC11_1: C11.1 D3.2 R36.1 | length 8.6
  Bottom Layer w0.635: R36.1 C11.1 D3.2
NetLED1_2: LED1.2 R45.1 | length 6.1
  Bottom Layer w0.635: R45.1 52.705,11.811 53.975,13.081 LED1.2
NetR6_1: R6.1 VR1.2 | length 13.7
  Bottom Layer w0.635: R6.1 27.94,69.469 35.941,69.469 37.592,67.818 VR1.2
NetR10_1: R10.1 R11.1 | length 6
  Bottom Layer w0.635: R11.1 R10.1
NetR13_2: R13.2 R14.1 | length 2.9
  Bottom Layer w0.635: R13.2 R14.1
NetR20_1: R20.1 VR2.2 | length 14.6
  Bottom Layer w0.635: R20.1 26.508,45.558 26.508,46.193 27.686,47.371 36.322,47.371 37.465,46.228 VR2.2
NetR24_1: R24.1 R25.1 | length 3.1
  Bottom Layer w0.635: R25.1 R24.1 R24.1@64.198,54.165
NetR27_2: R27.2 R28.1 | length 23.7
  Bottom Layer w0.635: R27.2 64.354,63.662 65.116,63.662 66.04,62.738 66.04,53.721 69.088,50.673 72.898,50.673 74.168,49.403 R28.1
NetR34_1: R34.1 VR3.2 | length 13.8
  Bottom Layer w0.635: R34.1 26.416,22.606 27.94,24.13 35.433,24.13 37.465,22.098 VR3.2
NetR38_1: R38.1 R39.1 | length 7.4
  Bottom Layer w0.635: R38.1 67.818,19.939 69.342,18.415 R39.1
NetR41_2: R41.2 R42.1 | length 12.5
  Bottom Layer w0.635: R41.2 72.136,15.113 73.533,16.51 73.533,21.082 72.116,22.499 71.917,22.499 71.556,22.86 R42.1
NetR43_2: R43.2 SW1.1 | length 6.2
  Bottom Layer w0.635: R43.2 60.071,8.128 SW1.1
NetR44_2: R44.2 SW1.3 | length 3.7
  Top Layer w0.635: SW1.3 SW1.3@69.469,11.43
  Bottom Layer w0.635: SW1.3 R44.2
NetU5_5: U5.5 U5.6 U5.7
OUT_1: OUT.1 R14.2 U2.1 | length 27.3
  Bottom Layer w0.635: U2.1 59.182,49.53 ; 60.579,48.133 60.579,40.259 61.595,39.243 R14.2 74.93,39.243
  Bottom Layer w0.889: 59.182,49.53 60.579,48.133
OUT_2: OUT.2 R28.2 U2.7 | length 19.7
  Top Layer w0.635: R28.2 70.739,46.99 72.009,45.72 72.009,37.338 72.669,36.678 74.93,36.678
  Bottom Layer w0.635: U2.7 R28.2
OUT_3: OUT.3 R42.2 U5.1 | length 24.2
  Top Layer w0.635: U5.1 58.387,30.988 69.469,30.988 R42.2
  Bottom Layer w0.635: R42.2 73.279,29.21 75.946,31.877 OUT.3@75.946,34.128
outB1: C3.2 R7.2 U1.7 | length 9.1
  Bottom Layer w0.635: U1.7 R7.2 C3.2
outB2: C7.2 R21.2 U3.7 | length 13.7
  Top Layer w0.635: R21.2 46.063,39.116 C7.2
  Bottom Layer w0.635: U3.7 R21.2
outB3: C11.2 R35.2 U4.7 | length 6.8
  Bottom Layer w0.635: U4.7 R35.2 C11.2
SCL: LCD.1 P1.5 | length 16.1
  Bottom Layer w0.635: LCD.1 68.834,53.975 69.977,52.832 76.962,52.832 79.629,55.499 P1.5
SDA: LCD.2 P1.3 | length 11.3
  Bottom Layer w0.635: LCD.2@71.374,56.388 71.374,57.667 71.746,58.039 P1.3
sensor_1+: R1.2 R2.1 SENSOR.1 | length 37.5
  Top Layer w0.635: SENSOR.1 5.833,63.618 4.309,63.618 2.54,61.849 2.54,36.322 3.81,35.052 R1.2
  Bottom Layer w0.635: SENSOR.1 R2.1
sensor_2+: R15.2 R16.1 SENSOR.3 | length 27.8
  Bottom Layer w0.635: R15.2 4.064,40.259 2.032,42.291 2.032,56.769 3.746,58.483 5.779,58.483 SENSOR.3 R16.1
sensor_3+: R29.2 R30.1 SENSOR.5 | length 15.2
  Bottom Layer w0.635: R29.2 6.18,45.636 4.783,45.636 3.556,46.863 3.556,52.451 4.48,53.375 4.835,53.375 4.859,53.4 5.775,53.4 SENSOR.5 R30.1
servo: P1.16 SERVO.3 | length 34.8
  Top Layer w0.635: SERVO.3 82.677,67.818 86.614,63.881 86.614,44.196 85.217,42.799 P1.16
VCC: LCD.3 P1.2 P1.4 R1.1 R10.2 R15.1 R24.2 R29.1 R38.2 R43.1 SERVO.2 U1.8 U2.8 U3.8 U4.8 U5.8 | length 292.6
  Top Layer w0.635: LCD.3 LCD.3@73.914,56.073
  Top Layer w0.889: R1.1 12.573,9.906 19.685,2.794 35.262,2.794 37.719,5.251 ; v2(37.592,28.575) 37.592,38.735 38.519,39.662 U3.8 ; v2(37.719,50.673) 37.719,60.706 39.116,62.103 U1.8 ; U4.8 38.608,16.51 37.719,15.621 37.719,5.251 ; R43.1 50.927,3.429 39.541,3.429 37.719,5.251 ; v2(60.325,34.798) 60.325,40.005 61.849,41.529 61.849,48.133 63.246,49.53 U2.8 71.755,49.53 73.914,51.689 LCD.3 73.914,57.785 67.945,63.754 67.945,70.612 69.088,71.755 72.517,71.755 73.914,70.358 SERVO.2
  Bottom Layer w0.635: R1.1@12.354,34.833 R1.1 ; R24.2@57.658,53.975 R24.2 ; U2.8@64.398,49.554 U2.8
  Bottom Layer w0.889: R1.1 R15.1 R29.1 ; v2(37.592,28.575) 41.91,24.257 41.91,17.493 U4.8 ; v2(37.719,50.673) 41.91,46.482 41.91,40.645 U3.8 ; U1.8 40.927,64.93 43.688,67.691 51.308,67.691 54.737,64.262 54.737,54.864 ; R10.2 47.498,54.737 48.514,53.721 53.594,53.721 54.737,54.864 ; R24.2@57.658,53.975 55.626,53.975 54.737,54.864 ; R24.2 62.333,49.554 U2.8@64.398,49.554 ; v2(60.325,34.798) 60.325,30.48 61.595,29.21 U5.8 R38.2 ; SERVO.2 73.914,69.596 74.549,70.231 79.248,70.231 83.82,65.659 P1.2
pads on no net: P1.7 P1.8 P1.10 P1.13 P1.15 P1.18 P1.19 P1.21 P1.22 P1.23 P1.24 P1.26 P1.27 P1.28 P1.29 P1.31 P1.32 P1.33 P1.35 P1.36 P1.37 P1.38 P1.40 SW1.4 VR1.3 VR2.3 VR3.3
copper on no net:
  other v1: 3,3 87,3 3,72 87,72

## Silkscreen, mask and mechanical layers (free items; w line width, h text height)
Top Overlay:
  text "1+" at 1.143,63.119 h1.27
  text "1-" at 1.225,60.761 h1.27
  text "VCC" at 74.554,60.299 h1.27 r90
  text "pwm" at 76.671,60.299 h1.27 r90
  text "GND" at 72.009,60.198 h1.27 r90
  text "2+" at 1.27,57.912 h1.27
  text "2-" at 1.352,55.554 h1.27
  text "3+" at 1.397,52.832 h1.27
  text "3-" at 1.479,50.474 h1.27
  text "GND" at 76.967,48.869 h1.27 r90
  text "VCC" at 74.3,48.742 h1.27 r90
  text "SCL" at 69.596,48.514 h1.27 r90
  text "SDA" at 71.628,48.514 h1.27 r90
  text "O1" at 71.755,38.735 h1.27
  text "O2" at 71.755,36.322 h1.27
  text "O3" at 71.755,33.655 h1.27
  text "LBORO" at 8.128,29.21 h5.08 r270
Mechanical 1:
  lines w0.635: 0,0 0,75 90,75 90,0 0,0